# Altium PCB Mini-Rambo-Panel.PcbDoc
Units mil, origin at the board's own origin, x right, y up, seen from the top; angles counter-clockwise.
Board outline 4600 x 8901.57 mil, 4 copper layers (Top, GND, Supply, Bottom), stack 59.2 mil thick; 6 components, 0 nets, 10 pads, 0 vias.
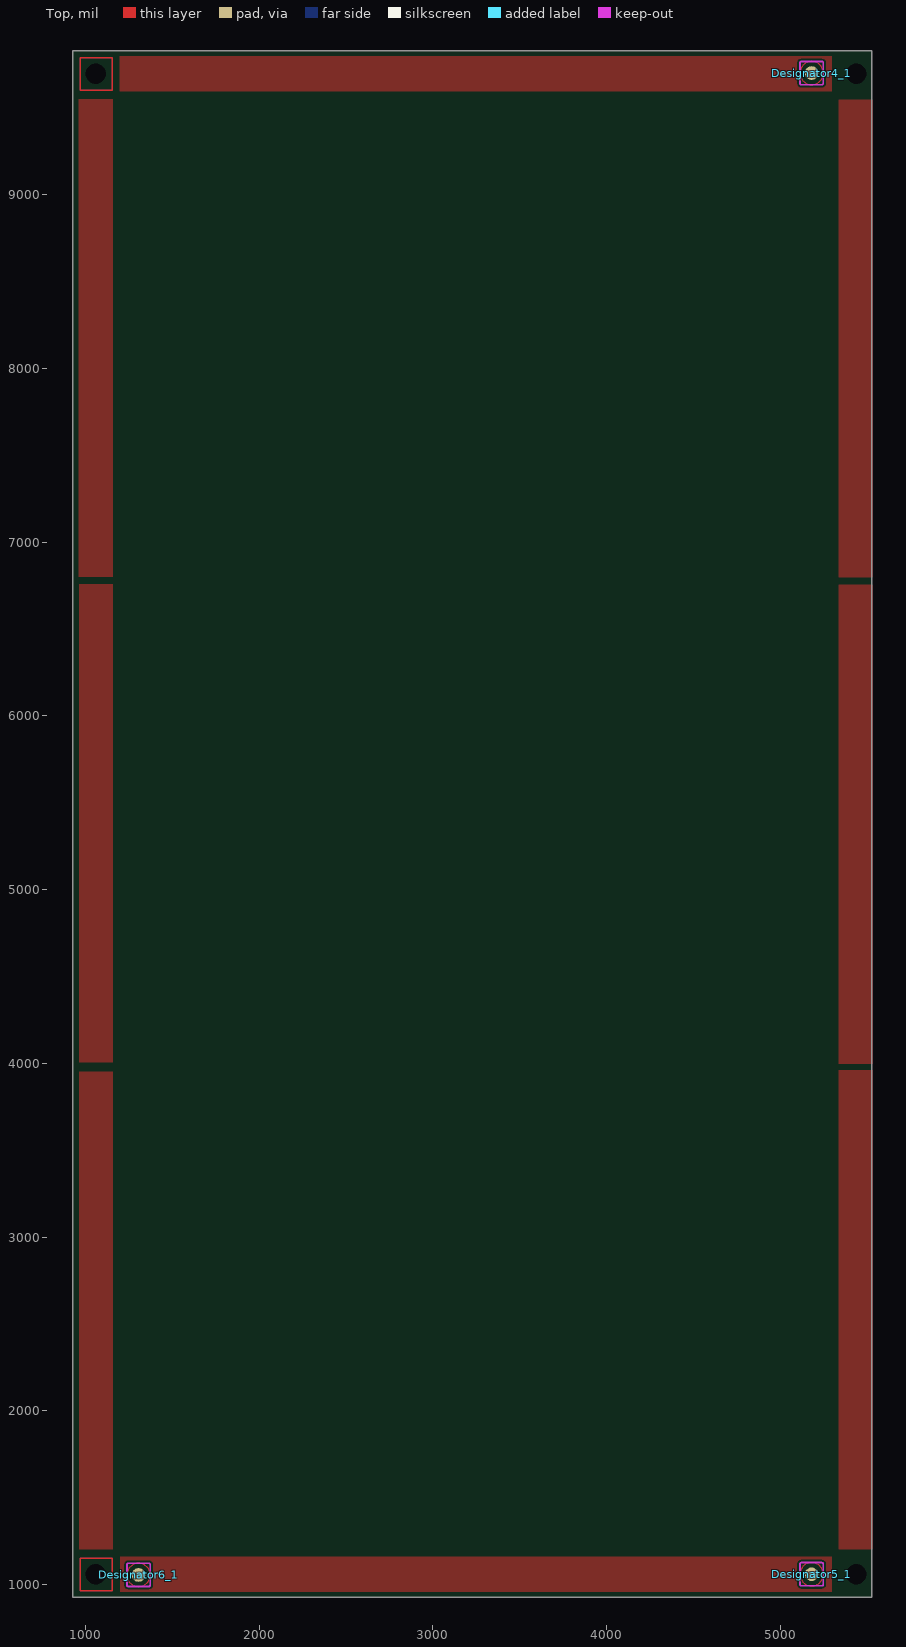
[diagram p0: Top view]
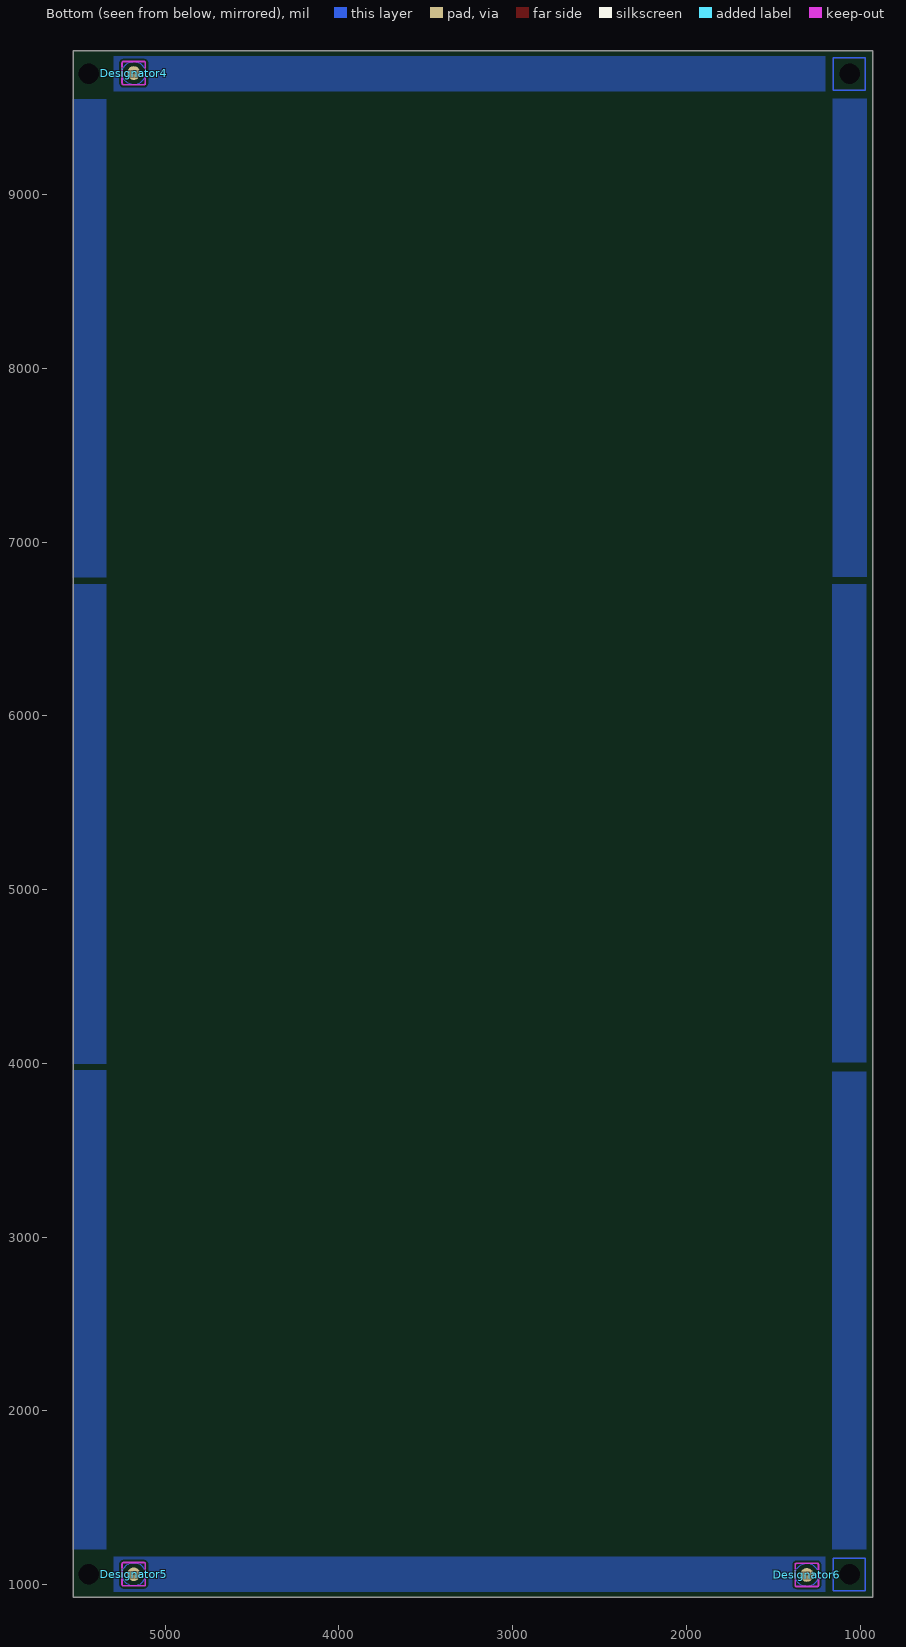
[diagram p1: Bottom view, seen from below]
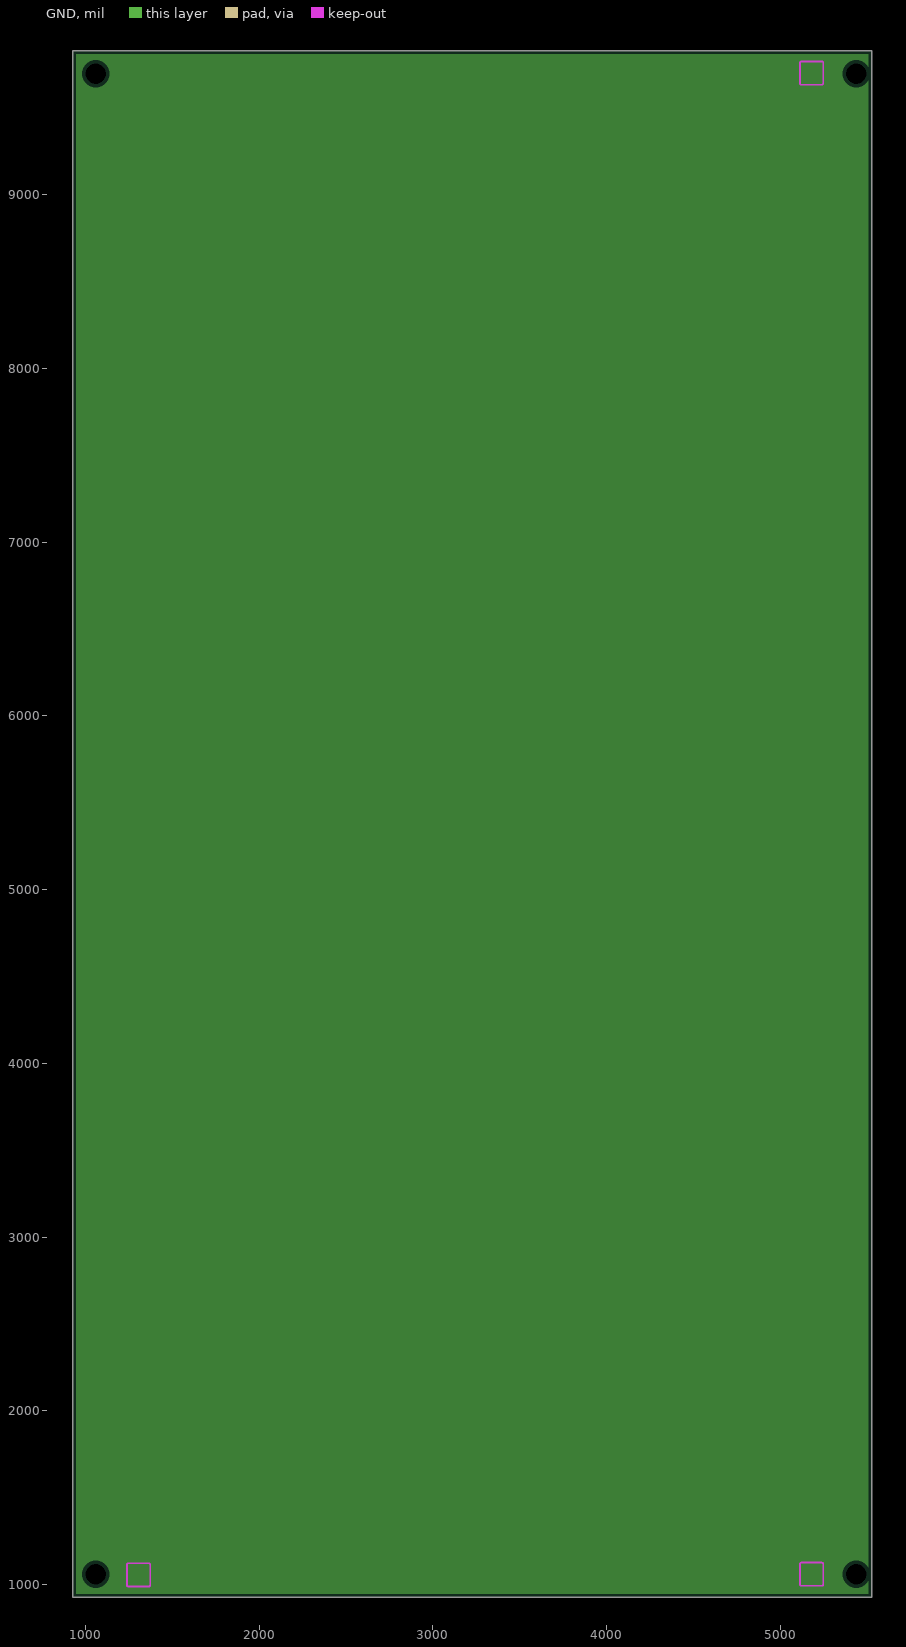
[diagram p2: GND, clearances drawn from the general rule]

## Layer stack, top to bottom
Top Solder: solder mask 0.4, Solder Resist, Dk 3.5
Top: signal copper 2.8
Dielectric 1: prepreg 5.4, FR-4, Dk 4.2
GND: plane copper 2.8
Dielectric 2: core 37.2, FR-4, Dk 4.2
Supply: signal copper 2.8
Dielectric 3: prepreg 5.4, FR-4, Dk 4.2
Bottom: signal copper 2.8
Bottom Solder: solder mask 0.4, Solder Resist, Dk 3.5

## Board outline
927.17,927.17 5527.16,927.17 5527.16,9828.74 927.17,9828.74

## Design rules (kind name [scope] priority, off if disabled: settings)
Clearance [All] p1: gap=10
PlaneClearance [All] p1: clearance=20
PlaneConnect [All] p1: planeconnectstyle=Relief reliefexpansion=20 reliefentries=4 reliefconductorwidth=10 reliefairgap=10
PolygonConnect [All] p1: connectstyle=Relief reliefconductorwidth=10 reliefentries=4 polygonreliefangle="90 Angle" airgapwidth=10
RoutingVias [All] p1: holewidth=28 width=50 viastyle="Through Hole" minholewidth=28 minwidth=50 maxholewidth=28 maxwidth=50
SolderMaskExpansion [All] p1: expansion=4
Width [All] p1: maxlimit=10 minlimit=10 preferedwidth=10
28 further rules are at their usual default settings.

## Components (designator, comment, footprint, x,y, rotation, side; value= is the part's Value field where it differs from the comment)
Designator4 "Comment" FIDUCIAL-2X3-PANEL 5180,9699.76 r90 bottom
Designator4_1 "Comment" FIDUCIAL-2X3-PANEL 5180,9699.76 r90 top
Designator5 "Comment" FIDUCIAL-2X3-PANEL 5180,1060 r90 bottom
Designator5_1 "Comment" FIDUCIAL-2X3-PANEL 5180,1060 r90 top
Designator6 "Comment" FIDUCIAL-2X3-PANEL 1306.1,1056.1 r90 bottom
Designator6_1 "Comment" FIDUCIAL-2X3-PANEL 1306.1,1056.1 r90 top

## Footprints (in the part's own frame and the unit in brackets; to place one, negate y for a bottom-side part, rotate by r counter-clockwise, add the part's x,y. Pads: shape width x height; smd on the part's side, far side on the other; paste and mask are expansions set on the pad)
FIDUCIAL-2X3-PANEL [mm]
  rrect100% 2x2 smd paste+0 mask+0.508: 1(0,0)
  Top circle w0.178: c0,0 r1.7
  Keep-Out Layer lines w0.254: -1.5,-1.7 cw(c-1.5,-1.5) -1.7,-1.5 -1.7,1.5 cw(c-1.5,1.5) -1.5,1.7 1.5,1.7 cw(c1.5,1.5) 1.7,1.5 1.7,-1.5 cw(c1.5,-1.5) 1.5,-1.7 -1.5,-1.7
  body extent -1.01,-1.01 1.02,1.01, height 0.02

## Free pads (board coordinates)
  round 0 hole 118.11 unplated paste-3897.64 mask-4.02: 0(1060.04,1060.04) 1(5437.99,1060.04) 2(5437.99,9695.87) 3(1060.04,9695.87)

## Nets (pads, with @x,y where several pads share a name; then routed paths per layer and width w, separated by ;. In a path a pad name is that pad's centre, name@x,y a point inside that pad or via, vN(x,y) a via of type N, cw(c..) or ccw(c..) an arc to the next point about the centre after c; other vN are vias at no path point)
pads on no net: Designator4.1 Designator4_1.1 Designator5.1 Designator5_1.1 Designator6.1 Designator6_1.1
copper on no net: | length 2960.6
  Top w10: 970.47,965.55 1154.53,965.55 1154.53,1151.57 970.47,1151.57 970.47,965.55 ; 970.47,9601.38 1154.53,9601.38 1154.53,9787.4 970.47,9787.4 970.47,9601.38
  Bottom w10: 970.47,965.55 1154.53,965.55 1154.53,1151.57 970.47,1151.57 970.47,965.55 ; 970.47,9601.38 1154.53,9601.38 1154.53,9787.4 970.47,9787.4 970.47,9601.38

## Polygon pours and split planes (outlines as drawn)
no net on Bottom "Frame-Copper" (solid, pour order 30): 5531.5,6756.89 5531.5,3997.05 5579.72,3997.05 5337.6,3997.05 5337.6,6756.89
no net on Bottom "Frame-Copper" (solid, pour order 32): 5531.5,3961.61 5531.5,1204.72 5579.72,1204.72 5337.6,1204.72 5337.6,3961.61
no net on Bottom "Frame-Copper" (solid, pour order 34): 1158.46,3951.77 1158.46,1204.72 1206.69,1204.72 964.57,1204.72 964.57,3951.77
no net on Bottom "Frame-Copper" (solid, pour order 40): 1158.46,6758.86 1158.46,4006.89 1206.69,4006.89 964.57,4006.89 964.57,6758.86
no net on Bottom "Frame-Copper" (solid, pour order 22): 1200.79,9595.47 5294.29,9595.47 5294.29,9795.28 1200.79,9795.28
no net on Bottom "Frame-Copper" (solid, pour order 28): 1200.79,960.63 5294.29,960.63 5294.29,1160.43 1200.79,1160.43
no net on Bottom "Frame-Copper" (solid, pour order 39): 1156.5,9552.17 1156.5,6800.2 1204.72,6800.2 962.6,6800.2 962.6,9552.17
no net on Bottom "Frame-Copper" (solid, pour order 38): 5531.5,9549.21 5531.5,6797.24 5579.72,6797.24 5337.6,6797.24 5337.6,9549.21
no net on Top "Frame-Copper" (solid, pour order 29): 5531.5,6754.92 5531.5,3997.05 5579.72,3997.05 5337.6,3997.05 5337.6,6754.92
no net on Top "Frame-Copper" (solid, pour order 31): 5531.5,3961.61 5531.5,1204.72 5579.72,1204.72 5337.6,1204.72 5337.6,3961.61
no net on Top "Frame-Copper" (solid, pour order 33): 1158.46,3951.77 1158.46,1204.72 1206.69,1204.72 964.57,1204.72 964.57,3951.77
no net on Top "Frame-Copper" (solid, pour order 37): 1158.46,6756.89 1158.46,4006.89 1206.69,4006.89 964.57,4006.89 964.57,6756.89
no net on Top "Frame-Copper" (solid, pour order 21): 1196.85,9595.47 5295.28,9595.47 5295.28,9795.28 1196.85,9795.28
no net on Top "Frame-Copper" (solid, pour order 27): 1200.79,960.63 5296.26,960.63 5296.26,1160.43 1200.79,1160.43
no net on Top "Frame-Copper" (solid, pour order 36): 1156.5,9550.2 1156.5,6800.2 1204.72,6800.2 962.6,6800.2 962.6,9550.2
no net on Top "Frame-Copper" (solid, pour order 35): 5531.5,9547.24 5531.5,6797.24 5579.72,6797.24 5337.6,6797.24 5337.6,9547.24
no net on GND (split plane): 5507.07,947.26 947.26,947.26 947.26,9808.64 5507.07,9808.64

## Silkscreen, mask and mechanical layers (free items; w line width, h text height)
Dimension:
  lines w10: 5520,927.17 927.17,927.17 927.17,9828.74 5527.16,9828.74 5527.16,927.17
PCB Document:
  drawing of 347 lines, arcs and shapes, not listed
  text "Notes" at 15360,7200 h60
  text "Layer" at 10826.77,7186.06 h60
  text "Name" at 11236.68,7186.06 h60
  text "Material" at 12166.43,7186.06 h60
  text "Thickness" at 13026.2,7186.06 h60
  text "Constant" at 13676.03,7186.06 h60
  text "Board Layer Stack" at 14245.89,7186.06 h60
  text "File" at 10520,7180 h60
  text "1" at 10826.77,7066.06 h60
  text "Top Paste" at 11236.68,7066.06 h60
  text "GTP" at 10540,7060 h60
  text "2" at 10826.77,6946.06 h60
  text "Top Overlay" at 11236.68,6946.06 h60
  text "GTO" at 10540,6940 h60
  text "3" at 10826.77,6826.06 h60
  text "Top Solder" at 11236.68,6826.06 h60
  text "Solder Resist" at 12166.43,6826.06 h60
  text "0.012mm" at 13026.2,6826.06 h60
  text "3.5" at 13676.03,6826.06 h60
  text "GTS" at 10540,6820 h60
  text "4" at 10826.77,6706.06 h60
  text "Top" at 11236.68,6706.06 h60
  text "Copper" at 12166.43,6706.06 h60
  text "0.070mm" at 13026.2,6706.06 h60
  text "GTL" at 10540,6700 h60
  text "5" at 10826.77,6586.06 h60
  text "Dielectric 1" at 11236.68,6586.06 h60
  text "FR-4" at 12166.43,6586.06 h60
  text "0.550mm" at 13026.2,6586.06 h60
  text "4.2" at 13676.03,6586.06 h60
  text "Negative Layer" at 15340,6480 h60
  text "6" at 10826.77,6466.06 h60
  text "GND" at 11236.68,6466.06 h60
  text "Copper" at 12166.43,6466.06 h60
  text "0.035mm" at 13026.2,6466.06 h60
  text "GP1" at 10540,6460 h60
  text "7" at 10826.77,6346.06 h60
  text "Dielectric 2" at 11236.68,6346.06 h60
  text "FR-4" at 12166.43,6346.06 h60
  text "0.260mm" at 13026.2,6346.06 h60
  text "4.2" at 13676.03,6346.06 h60
  text "8" at 10826.77,6226.06 h60
  text "Supply" at 11236.68,6226.06 h60
  text "Copper" at 12166.43,6226.06 h60
  text "0.035mm" at 13026.2,6226.06 h60
  text "G1" at 10540,6220 h60
  text "9" at 10826.77,6106.06 h60
  text "Dielectric 3" at 11236.68,6106.06 h60
  text "FR-4" at 12166.43,6106.06 h60
  text "0.550mm" at 13026.2,6106.06 h60
  text "4.2" at 13676.03,6106.06 h60
  text "GBL" at 10540,6000 h60
  text "10" at 10826.77,5986.06 h60
  text "Bottom" at 11236.68,5986.06 h60
  text "Copper" at 12166.43,5986.06 h60
  text "0.070mm" at 13026.2,5986.06 h60
  text "11" at 10826.77,5866.06 h60
  text "Bottom Solder" at 11236.68,5866.06 h60
  text "Solder Resist" at 12166.43,5866.06 h60
  text "0.012mm" at 13026.2,5866.06 h60
  text "3.5" at 13676.03,5866.06 h60
  text "GBS" at 10540,5860 h60
  text "12" at 10826.77,5746.06 h60
  text "Bottom Overlay" at 11236.68,5746.06 h60
  text "13" at 10826.77,5626.06 h60
  text "Bottom Paste" at 11236.68,5626.06 h60
Drill Drawing:
  lines w10: 11041.67,3050.86 11058.33,3050.86 11058.33,3034.19 11091.67,3034.19 11091.67,3050.86 11108.33,3050.86 11108.33,3084.19 11091.67,3084.19 11091.67,3100.86 11058.33,3100.86 11058.33,3084.19 11041.67,3084.19 11041.67,3050.86 ; 11055,3057.53 11065,3057.53 11065,3047.53 11085,3047.53 11085,3057.53 11095,3057.53 11095,3077.53 11085,3077.53 11085,3087.53 11065,3087.53 11065,3077.53 11055,3077.53 11055,3057.53
  lines w15: 10981.88,2989.19 14860.85,2989.19 ; 10981.88,3139.19 14860.85,3139.19 ; 11532.75,2839.19 11532.75,3289.19 ; 12230.56,2839.19 12230.56,3289.19 ; 13576.17,2839.19 13576.17,3289.19 ; 14082.04,2839.19 14082.04,3289.19 ; 10981.88,2839.19 14860.85,2839.19 14860.85,3289.19 10981.88,3289.19 10981.88,2839.19
  text "Symbol" at 11071.88,3184.19 h72
  text "Hit Count" at 11577.75,3184.19 h72
  text "Finished Hole Size" at 12275.56,3184.19 h72
  text "Plated" at 13621.17,3184.19 h72
  text "Hole Type" at 14127.04,3184.19 h72
  text "4" at 11577.75,3034.19 h60
  text "3.000mm (118.11mil)" at 12275.56,3034.19 h60
  text "NPTH" at 13621.17,3034.19 h60
  text "Round" at 14127.04,3034.19 h60
  text "4 Total" at 11577.75,2884.19 h60
V-Score:
  lines w10: 927.17,1177.17 5527.16,1177.17 ; 927.17,3978.35 5527.16,3978.35 ; 927.17,6777.56 5527.16,6777.56 ; 930.12,9578.74 5527.16,9578.74 ; 1177.17,931.1 1177.17,9828.74 ; 5316.93,927.16 5316.93,9828.74
Panel Outline:
  the board outline again, w10

## Dimensions
927.17,927.17 to 5527.16,927.17 on Bot Courtyard

## Panel: embedded boards
"..\Mini-Rambo\board\Mini-Rambo.PcbDoc" at 1181.1,1181.1, 3 rows x 1 columns, spacing 2799.21 x 4137.8, rotation 0